# Altium PCB cs301_template.PcbDoc
Units mil, origin at the board's own origin, x right, y up, seen from the top; angles counter-clockwise.
Board outline 3460 x 5000 mil, 2 copper layers (Top Layer, Bottom Layer); 109 components, 56 nets, 306 pads, 93 vias.
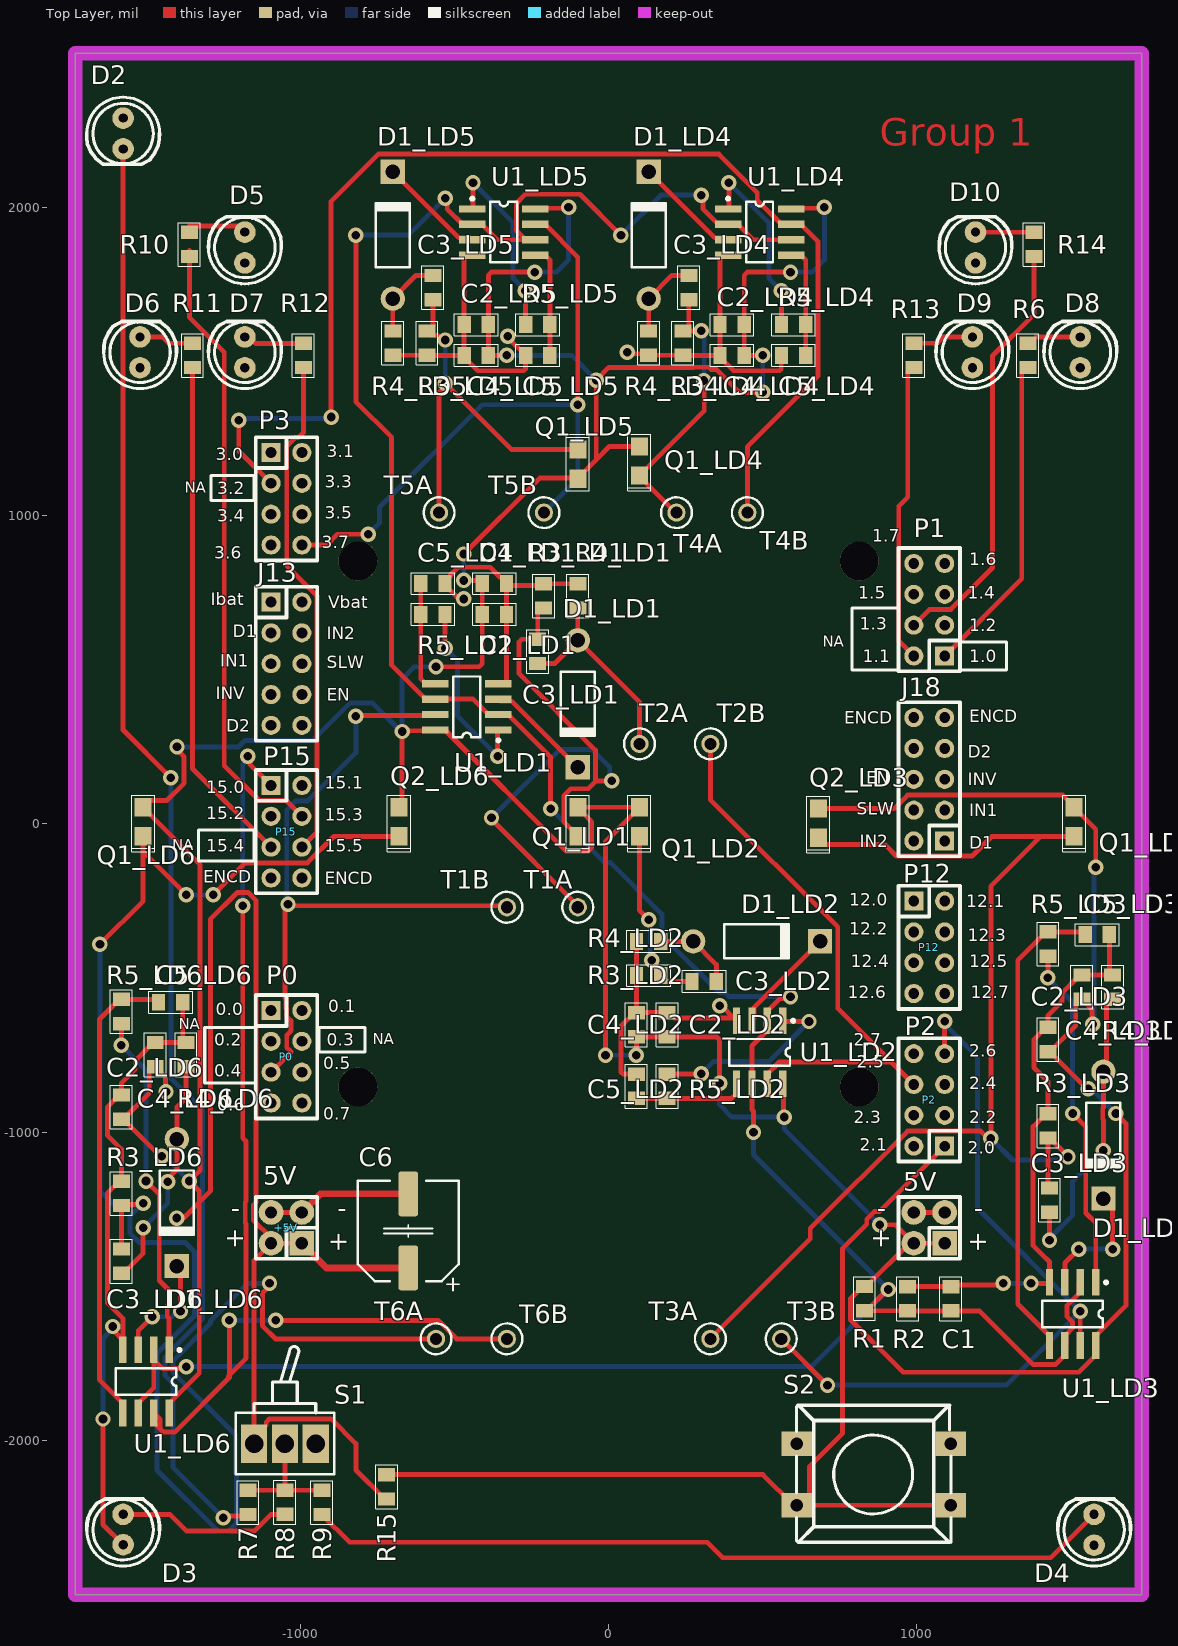
[diagram p0: Top Layer view]
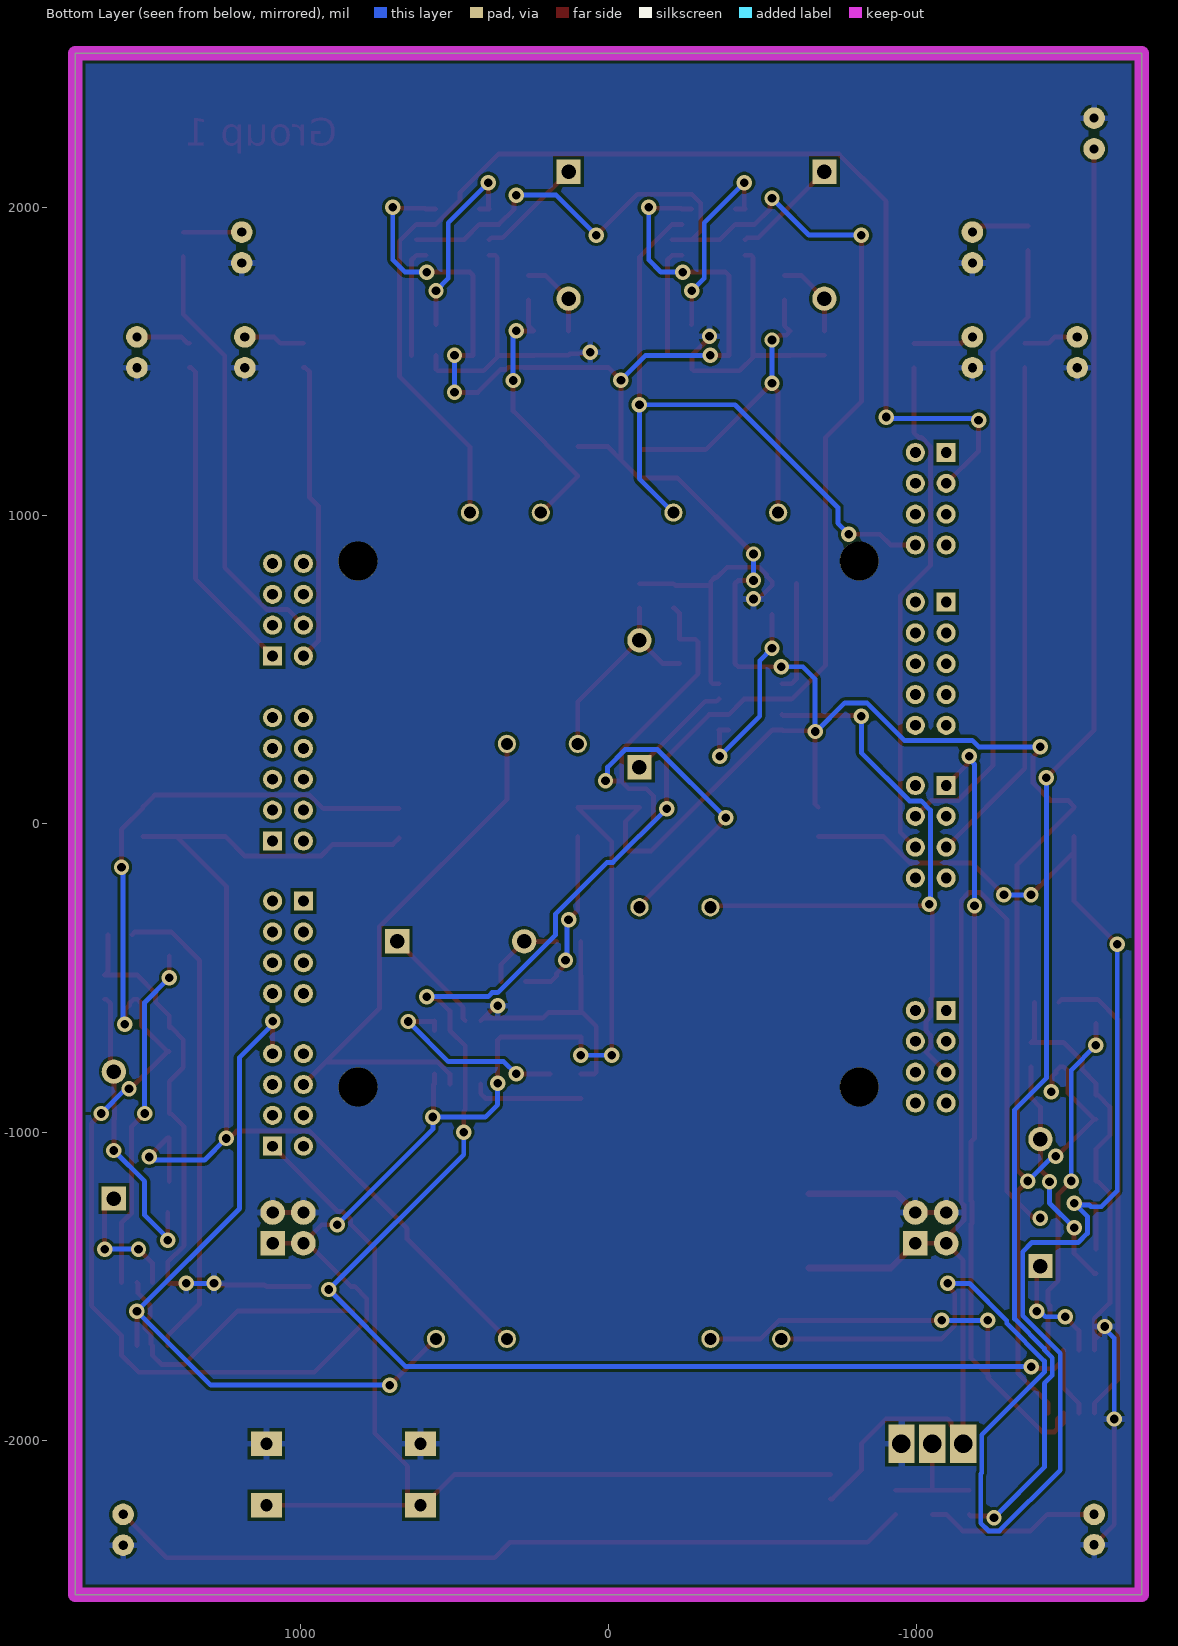
[diagram p1: Bottom Layer view, seen from below]

## Layer stack, top to bottom
Top Solder: solder mask 0.4, Solder Resist, Dk 3.5
Top Layer: signal copper 1.4
Dielectric1: dielectric 12.6, FR-4, Dk 4.8
Bottom Layer: signal copper 1.4
Bottom Solder: solder mask 0.4, Solder Resist, Dk 3.5

## Board outline
-1730,-2500 -1730,2500 1730,2500 1730,-2500

## Design rules (kind name [scope] priority, off if disabled: settings)
Clearance [All] p1: gap=10 ignorepadtopadclearanceinfootprint=FALSE except(0: Arc-Hole Track-Hole SMDPad-Hole THPad-Hole Via-Hole Fill-Hole Poly-Hole Region-Hole Text-Hole)
PolygonConnect [All] p1: connectstyle=Relief reliefconductorwidth=20 reliefentries=4 polygonreliefangle="90 Angle" airgapwidth=10
RoomDefinition LD1 [InComponentClass('LD1')] p1: confinementstyle=ConfineIn formatcopy=TRUE lockcomponents=FALSE outline 40,980 -780,980 -780,40 40,40
RoomDefinition LD3 [InComponentClass('LD3')] p2: confinementstyle=ConfineIn formatcopy=TRUE lockcomponents=FALSE outline 1685.63,-189.13 1345.63,-189.13 1345.63,-1840.94 1685.63,-1840.94
RoomDefinition LD2 [InComponentClass('LD2')] p3: confinementstyle=ConfineIn formatcopy=TRUE lockcomponents=FALSE outline -110,-240.63 -110,-1060.63 840,-1060.63 840,-240.63
RoomDefinition LD5 [InComponentClass('LD5')] p4: confinementstyle=ConfineIn formatcopy=TRUE lockcomponents=FALSE outline -840,1320 -20,1320 -20,2230 -840,2230
RoomDefinition LD4 [InComponentClass('LD4')] p5: confinementstyle=ConfineIn formatcopy=TRUE lockcomponents=FALSE outline -10,1320 810,1320 810,2250 -10,2250
RoutingVias [All] p1: holewidth=28 width=50 viastyle="Through Hole" minholewidth=28 minwidth=50 maxholewidth=28 maxwidth=50
SilkToSolderMaskClearance SilkscreenOverComponentPads [IsPad] p1: minsilkscreentomaskgap=10 clearancetoexposedcopper=TRUE
SolderMaskExpansion TentingVias [IsVia] p1: expansion=9.84 istentingtop=TRUE useseparateexpansions=TRUE expansionbottom=9.84 istentingbottom=TRUE
SolderMaskExpansion [All] p2: expansion=4 istentingtop=FALSE
SupplyNets "Schematic Supply Nets_2" [InNet('VREF1')] p1: voltage=0.000
SupplyNets "Schematic Supply Nets_1" [InNet('+5V')] p2: voltage=0.000
SupplyNets "Schematic Supply Nets" [InNet('GND')] p3: voltage=0.000
Width [All] p1: maxlimit=30 minlimit=15.75 preferedwidth=15.75 minimp=50.000000 maximp=50.000000 favimp=50.000000
29 further rules are at their usual default settings.

## Classes and differential pairs
channel class LD: LD1 LD2 LD3 LD4 LD5 LD6
component class LD6: C2_LD6 C3_LD6 C4_LD6 C5_LD6 D1_LD6 Q1_LD6 Q2_LD6 R3_LD6 R4_LD6 R5_LD6 U1_LD6
component class LD5: C2_LD5 C3_LD5 C4_LD5 C5_LD5 D1_LD5 Q1_LD5 R3_LD5 R4_LD5 R5_LD5 U1_LD5
component class LD4: C2_LD4 C3_LD4 C4_LD4 C5_LD4 D1_LD4 Q1_LD4 R3_LD4 R4_LD4 R5_LD4 U1_LD4
component class LD3: C2_LD3 C3_LD3 C4_LD3 C5_LD3 D1_LD3 Q1_LD3 Q2_LD3 R3_LD3 R4_LD3 R5_LD3 U1_LD3
component class LD2: C2_LD2 C3_LD2 C4_LD2 C5_LD2 D1_LD2 Q1_LD2 R3_LD2 R4_LD2 R5_LD2 U1_LD2
component class LD1: C2_LD1 C3_LD1 C4_LD1 C5_LD1 D1_LD1 Q1_LD1 R3_LD1 R4_LD1 R5_LD1 U1_LD1

## Components (designator, comment, footprint, x,y, rotation, side; value= is the part's Value field where it differs from the comment)
5V "5V" IDC4 1090,-1360 r90 top locked
+5V "5V" IDC4 -995,-1360 r90 top locked
C1 "100nf" "0805 CAP" 1110,-1540 r90 top
C2_LD1 "100nf" "0805 CAP" -370.63,680 r0 top (schematic designator C2)
C2_LD2 "100nf" "0805 CAP" 190,-651.26 r90 top (schematic designator C2)
C2_LD3 "100nf" "0805 CAP" 1425,-699.13 r90 top (schematic designator C2)
C2_LD4 "100nf" "0805 CAP" 400.63,1620 r180 top (schematic designator C2)
C2_LD5 "100nf" "0805 CAP" -429.37,1620 r180 top (schematic designator C2)
C2_LD6 "100nf" "0805 CAP" -1580.63,-918.19 r90 top (schematic designator C2)
C3_LD1 "150nf" "0805 CAP" -230,560 r270 top (schematic designator C3)
C3_LD2 "150nf" "0805 CAP" 310,-510.63 r0 top (schematic designator C3)
C3_LD3 "150nf" "0805 CAP" 1430,-1220 r270 top (schematic designator C3)
C3_LD4 "150nf" "0805 CAP" 260,1740 r90 top (schematic designator C3)
C3_LD5 "150nf" "0805 CAP" -570,1740 r90 top (schematic designator C3)
C3_LD6 "150nf" "0805 CAP" -1580.63,-1418.19 r270 top (schematic designator C3)
C4_LD1 "100nf" "0805 CAP" -370.63,780 r0 top (schematic designator C4)
C4_LD2 "100nf" "0805 CAP" 90,-651.26 r90 top (schematic designator C4)
C4_LD3 "100nf" "0805 CAP" 1535,-529.13 r90 top (schematic designator C4)
C4_LD4 "100nf" "0805 CAP" 400.63,1520 r180 top (schematic designator C4)
C4_LD5 "100nf" "0805 CAP" -429.37,1520 r180 top (schematic designator C4)
C4_LD6 "100nf" "0805 CAP" -1470.63,-748.19 r90 top (schematic designator C4)
C5_LD1 "150nf" "0805 CAP" -570,780 r0 top (schematic designator C5)
C5_LD2 "150nf" "0805 CAP" 90,-850.63 r90 top (schematic designator C5)
C5_LD3 "150nf" "0805 CAP" 1585,-359.13 r0 top (schematic designator C5)
C5_LD4 "150nf" "0805 CAP" 600,1520 r180 top (schematic designator C5)
C5_LD5 "150nf" "0805 CAP" -230,1520 r180 top (schematic designator C5)
C5_LD6 "150nf" "0805 CAP" -1420.63,-578.19 r0 top (schematic designator C5)
C6 "*" "CAP POL 8x5.4mm SMT" -650,-1319.92 r90 top
D1_LD1 "" ECE-DIO10.46-5.3x2.8TH -100,390 r270 top value=BAT85 (schematic designator D1)
D1_LD2 "" ECE-DIO10.46-5.3x2.8TH 480,-380.63 r0 top value=BAT85 (schematic designator D1)
D1_LD3 "" ECE-DIO10.46-5.3x2.8TH 1605,-1009.13 r270 top value=BAT85 (schematic designator D1)
D1_LD4 "" ECE-DIO10.46-5.3x2.8TH 130,1910 r90 top value=BAT85 (schematic designator D1)
D1_LD5 "" ECE-DIO10.46-5.3x2.8TH -700,1910 r90 top value=BAT85 (schematic designator D1)
D1_LD6 "" ECE-DIO10.46-5.3x2.8TH -1400.63,-1228.19 r270 top value=BAT85 (schematic designator D1)
D2 "LED" LED0.1/5MM#1 -1574.8,2189.76 r180 top locked
D3 "LED" LED0.1/5MM#2 -1574.8,-2239.37 r0 top locked
D4 "LED" LED0.1/5MM#1 1574.8,-2239.37 r0 top locked
D5 "LED" LED0.1/5MM#1 -1180,1920 r0 top
D6 "LED" LED0.1/5MM#1 -1520,1580 r0 top
D7 "LED" LED0.1/5MM#1 -1180,1580 r0 top
D8 "LED" LED0.1/5MM#1 1530,1580 r0 top
D9 "LED" LED0.1/5MM#1 1180,1580 r0 top
D10 "LED" LED0.1/5MM#1 1190,1920 r0 top
J13 "CON10" IDC10 -1095,720 r270 top locked
J18 "CON10" IDC10 1090,-55 r90 top locked
P0 "P0" idc8 -1095,-605 r270 top locked
P1 "P1" idc8 1090,545 r90 top locked
P2 "P2" idc8 1090,-1045 r90 top locked
P3 "P3" idc8 -1095,1205 r270 top locked
P12 "P12" idc8 990,-250 r270 top locked
P15 "P15" IDC8 -1095,125 r270 top locked
Q1_LD1 "VEMT3700" "0805 LED" -100,7.24 r270 top locked (schematic designator Q1)
Q1_LD2 "VEMT3700" "0805 LED" 100,7.24 r270 top (schematic designator Q1)
Q1_LD3 "VEMT3700" "0805 LED" 1510,7.24 r270 top locked (schematic designator Q1)
Q1_LD4 "VEMT3700" "0805 LED" 100,1177.24 r270 top locked (schematic designator Q1)
Q1_LD5 "VEMT3700" "0805 LED" -100,1167.4 r90 top locked (schematic designator Q1)
Q1_LD6 "VEMT3700" "0805 LED" -1510,7.24 r270 top locked (schematic designator Q1)
Q2_LD3 "VEMT3700" "0805 LED" 680,2.76 r270 top (schematic designator Q2)
Q2_LD6 "VEMT3700" "0805 LED" -680,7.24 r270 top (schematic designator Q2)
R1 "270k" "0805 RES" 830,-1539.37 r90 top
R2 "30k" "0805 RES" 970,-1540 r270 top
R3_LD1 "47k" "0805 RES" -210.63,740 r270 top (schematic designator R3)
R3_LD2 "47k" "0805 RES" 130,-491.26 r0 top (schematic designator R3)
R3_LD3 "47k" "0805 RES" 1425,-979.13 r270 top (schematic designator R3)
R3_LD4 "47k" "0805 RES" 240.63,1560 r90 top (schematic designator R3)
R3_LD5 "47k" "0805 RES" -589.37,1560 r90 top (schematic designator R3)
R3_LD6 "47k" "0805 RES" -1580.63,-1198.19 r270 top (schematic designator R3)
R4_LD1 "100k" "0805 RES" -100,740 r270 top (schematic designator R4)
R4_LD2 "100k" "0805 RES" 130,-380.63 r0 top (schematic designator R4)
R4_LD3 "100k" "0805 RES" 1635,-529.13 r270 top (schematic designator R4)
R4_LD4 "100k" "0805 RES" 130,1560 r90 top (schematic designator R4)
R4_LD5 "100k" "0805 RES" -700,1560 r90 top (schematic designator R4)
R4_LD6 "100k" "0805 RES" -1370.63,-748.19 r270 top (schematic designator R4)
R5_LD1 "100k" "0805 RES" -570,680 r180 top (schematic designator R5)
R5_LD2 "100k" "0805 RES" 190,-850.63 r270 top (schematic designator R5)
R5_LD3 "100k" "0805 RES" 1425,-389.13 r90 top (schematic designator R5)
R5_LD4 "100k" "0805 RES" 600,1620 r0 top (schematic designator R5)
R5_LD5 "100k" "0805 RES" -230,1620 r0 top (schematic designator R5)
R5_LD6 "100k" "0805 RES" -1580.63,-608.19 r90 top (schematic designator R5)
R6 "RES4" "0805 RES" 1360,1520 r270 top
R7 "RES1" "0805 RES" -1170,-2200.63 r90 top
R8 "RES2" "0805 RES" -1050,-2200 r90 top
R9 "RES3" "0805 RES" -930,-2200.63 r90 top
R10 "RES4" "0805 RES" -1360,1880 r270 top
R11 "RES5" "0805 RES" -1350,1520 r270 top
R12 "RES6" "0805 RES" -990,1520 r270 top
R13 "RES5" "0805 RES" 990,1520 r270 top
R14 "RES6" "0805 RES" 1380,1880 r270 top
R15 "*" "0805 RES" -720,-2150 r90 top
S1 "SW-SPDT" SW-SPDT -1150,-2010 r0 top
S2 "SW-PB" SW-PB 1010,-2230 r180 top
T1A "Comment" TP_TH -100,-270 r0 top
T1B "Comment" TP_TH -330,-270 r0 top
T2A "Comment" TP_TH 100,260 r0 top
T2B "Comment" TP_TH 330,260 r0 top
T3A "Comment" TP_TH 330,-1670 r0 top
T3B "Comment" TP_TH 560,-1670 r0 top
T4A "Comment" TP_TH 220,1010 r0 top
T4B "Comment" TP_TH 450,1010 r0 top
T5A "Comment" TP_TH -550,1010 r0 top
T5B "Comment" TP_TH -210,1010 r0 top
T6A "Comment" TP_TH -560,-1670 r0 top
T6B "Comment" TP_TH -330,-1670 r0 top
U1_LD1 "TLC082" ECE-SOIC8 -460,380 r180 top (schematic designator U1)
U1_LD2 "TLC082" ECE-SOIC8 490,-740.63 r270 top (schematic designator U1)
U1_LD3 "TLC082" ECE-SOIC8 1505,-1589.13 r270 top (schematic designator U1)
U1_LD4 "TLC082" ECE-SOIC8 490,1920 r0 top (schematic designator U1)
U1_LD5 "TLC082" ECE-SOIC8 -340,1920 r0 top (schematic designator U1)
U1_LD6 "TLC082" ECE-SOIC8 -1500.63,-1808.19 r270 top (schematic designator U1)

## Footprints (in the part's own frame and the unit in brackets; to place one, negate y for a bottom-side part, rotate by r counter-clockwise, add the part's x,y. Pads: shape width x height; smd on the part's side, far side on the other; paste and mask are expansions set on the pad)
"0805 CAP" [mm] "http://www.digikey.co.nz/Web%20Export/Supplier%20Content/Vishay_8026/PDF/VishayBeyschlag_SolderPad.pdf?redirected=1 with dimension G modified by +0.25mm"
  rect 1.1x1.4 smd: 1(-1,0) 2(1,0)
  silkscreen extent -1.8,-0.9 1.8,0.9, body extent -1.04,-0.66 1.04,0.66, height 0.61
"0805 LED" [mm] "RED AS AlGaAs SMD LED, Body; 2mm x 1.25 mm (LxW)"
  rect 1.5x1.4 smd: 1(-1.2,0) 2(1.2,0)
  silkscreen extent -2.2,-0.95 2.45,0.95, body extent -1,-0.63 1,0.63, height 1.1
"0805 RES" [mm] "http://www.digikey.co.nz/Web%20Export/Supplier%20Content/Vishay_8026/PDF/VishayBeyschlag_SolderPad.pdf?redirected=1 with dimension G modified by +0.25mm"
  rect 1.1x1.4 smd: 1(-1,0) 2(1,0)
  silkscreen extent -1.8,-0.9 1.8,0.9, body extent -1.04,-0.66 1.04,0.66, height 0.61
"CAP POL 8x5.4mm SMT" [mm]
  round 0.508 on Mech15: 0(0,0)
  rrect25% 3.7x1.6 smd: 1(-3.05,0) 2(3.05,0)
  silkscreen extent -4.9,-4.2 4.15,4.15, body extent -4.5,-4.15 4.5,4.15, height 5.4
ECE-DIO10.46-5.3x2.8TH [mm] "Diode, Axial; Body 5.2 x 2.7 mm (LxDia. max), Lead Dia. 0.86 mm (max)"
  round 2 hole 1.2: 1(-5.23,0)
  rect 2x2 hole 1.2: 2(5.23,0)
  silkscreen extent -2.65,-1.4 2.74,1.4
ECE-SOIC8 [mm] "Small Outline; 8 Leads; Body Width 3.9 mm; Pitch 1.27 mm"
  rect 2.2x0.6 smd: 1(-2.6,1.905) 2(-2.6,0.635) 3(-2.6,-0.635) 4(-2.6,-1.905) 5(2.6,-1.905) 6(2.6,-0.635) 7(2.6,0.635) 8(2.6,1.905)
  silkscreen extent -2.72,-2.5 1.1,2.88, body extent -3,-2.45 3,2.45, height 1.7
IDC4 [mil]
  rect 80x80 hole 40: 1(0,0)
  round 80 hole 40: 2(0,100) 3(100,0) 4(100,100)
  silkscreen extent -50,-50 150,150
idc8 [mil]
  rect 62x62 hole 35: 1(0,0)
  round 62 hole 35: 2(0,100) 3(100,0) 4(100,100) 5(200,0) 6(200,100) 7(300,0) 8(300,100)
  silkscreen extent -50,-50 350,150
IDC8 [mil]
  rect 62x62 hole 35: 1(0,0)
  round 62 hole 35: 2(0,100) 3(100,0) 4(100,100) 5(200,0) 6(200,100) 7(300,0) 8(300,100)
  silkscreen extent -50,-50 350,150
IDC10 [mil]
  rect 62x62 hole 35: 1(0,0)
  round 62 hole 35: 2(0,100) 3(100,0) 4(100,100) 5(200,0) 6(200,100) 7(300,0) 8(300,100) 9(400,0) 10(400,100)
  silkscreen extent -50,-50 450,150
LED0.1/5MM#1 [mil]
  round 70 hole 30: A(0,0) K(0,-100)
  silkscreen extent -118,-168 118,50
LED0.1/5MM#2 [mil]
  round 70 hole 30: A(0,0) K(0,-98.42)
  silkscreen extent -118,-168 118,50
SW-PB [mil]
  rect 100x80 hole 40: 1(-100,-20) 1(400,-20) 2(-100,-220) 2(400,-220)
  silkscreen extent -100,-345 400,100
SW-SPDT [mil]
  rect 85x125 hole 60: 1(0,0) 2(100,0) 3(200,0)
  silkscreen extent -60,-100 260,315
TP_TH [mm] "Test Point, Through Hole, Dia 2.54mm"
  round 1.5 hole 1: 1(0,0)
  silkscreen extent -1.27,-1.27 1.27,1.27, body extent -1.27,-1.27 1.27,1.27, height 4.57

## Part data
5V +5V: library part CON4, "Connector"
C1 C2_LD1 C2_LD2 C2_LD3 C2_LD4 C2_LD5 C2_LD6 C3_LD1 C3_LD2 C3_LD3 C3_LD4 C3_LD5 C3_LD6 C4_LD1 C4_LD2 C4_LD3 C4_LD4 C4_LD5 C4_LD6 C5_LD1 C5_LD2 C5_LD3 C5_LD4 C5_LD5 C5_LD6: library part CerCap_SMT_0805, "SMT ceramic capacitor 0805 size"
C6: library part ElecCap_SMT_8D0, "CAP ALUM 22UF 20% 50V SMD (Model: UWX1H220MCL1GB)", Capacitance 1="22 µF", ESR (Equivalent Series Resistance)=-, Lifetime @ Temp.="2000 Hrs @ 85°C", Manufacturer=Nichicon, Manufacturer Part Number=UWX1V220MCL1GB, Operating Temperature="-40°C ~ 85°C", Package / Case="Radial, Can - SMD", Supplier Part Number 1=493-2136-1-ND, Tolerance=±20%, Applications="General Purpose", Category=Capacitors, ComponentLink1Description=http://nichicon-us.com/english/products/pdfs/e-uwx.pdf, ComponentLink1URL=http://nichicon-us.com/english/products/pdfs/e-uwx.pdf, Height - Seated (Max)="0.213\" (5.40mm)", Lead Spacing=-, Mounting Type="Surface Mount", Packaging="Cut Tape (CT)", Part Status=Active, Polarization=Polar, Pricing 1="1=0.59, 10=0.406, 100=0.2304, 500=0.16268 (NZD)", Ratings=-, Revision="July-2002: Re-released for DXP Platform.", RoHS="RoHS Compliant", Size / Dimension="0.248\" Dia (6.30mm)", Stock 1=680, Supplier 1=Digi-Key, Surface Mount Land Size="0.260\" L x 0.260\" W (6.60mm x 6.60mm)"
D1_LD1 D1_LD2 D1_LD3 D1_LD4 D1_LD5 D1_LD6: library part DIO000006, "Schottky Small Signal Diode 200mA 30V TH", Manufactuer=NXP, Manufacturer-PN=BAT85, Size/Package=Axial, Voltage/Current=200mA-30V, Assembly Method="Through hole", Category=Diode, Datasheet Link=http://share.engineering.auckland.ac.nz/ece/ts/Student%20Documents/BAT85_diode.pdf, Item Type=Item, Path="ece/ts/Lists/Stock Inventory", Status=Active, Supplier1=Element14, Supplier1-PN=1097299, UoA Stock#=DIO000006
J13 J18: "Connector"
P0 P1 P2 P3: library part CON8, "Connector"
P12 P15: library part CON8_1, "Connector"
Q1_LD1 Q1_LD2 Q1_LD3 Q1_LD4 Q1_LD5 Q1_LD6 Q2_LD3 Q2_LD6: "Silicon NPN Phototransistor"
R1 R2 R3_LD1 R3_LD2 R3_LD3 R3_LD4 R3_LD5 R3_LD6 R4_LD1 R4_LD2 R4_LD3 R4_LD4 R4_LD5 R4_LD6 R5_LD1 R5_LD2 R5_LD3 R5_LD4 R5_LD5 R5_LD6 R6 R7 R8 R9 R10 R11 R12 R13 R14 R15: library part Res_SMT_0805, "0805 resistor", ComponentLink1Description=https://nz.mouser.com/datasheet/2/315/AOA0000C304-1149620.pdf, LatestRevisionDate=17-Jul-2002, LatestRevisionNote="Re-released for DXP Platform.", PackageReference=AXIAL-0.4, Published=8-Jun-2000, Publisher="Altium Limited"
S1: "Toggle Switch"
S2: "Push Button Switch"
U1_LD1 U1_LD2 U1_LD3 U1_LD4 U1_LD5 U1_LD6: library part OPA000103, "IC OPAMP TLC082 GP 10MHZ 8SOIC", Manufactuer="Texas Instruments", Manufacturer-PN=TLC082IDR, Size/Package="SOIC 8", Assembly Method="Surface Mount", Category=OpAmp, Component Type=SOIC18-TLC082, Datasheet Link=http://share.engineering.auckland.ac.nz/ece/ts/Student%20Documents/TLC082.pdf, Item Type=Item, Path="ece/ts/Lists/Stock Inventory", Status=Active, Supplier1=Digikey, Supplier1-PN=296-7271-6-ND, UoA Stock#=OPA000103

## Free pads (board coordinates)
  round 125.98 hole 125.98 unplated: 1(-813,-853) 1(-813,853) 1(813,-853) 1(813,853)

## Via types
v1: diameter 50, hole 28, Top Layer to Bottom Layer, tented both sides, 93 vias

## Nets (pads, with @x,y where several pads share a name; then routed paths per layer and width w, separated by ;. In a path a pad name is that pad's centre, name@x,y a point inside that pad or via, vN(x,y) a via of type N, cw(c..) or ccw(c..) an arc to the next point about the centre after c; other vN are vias at no path point)
+5V: 5V.1 5V.2 +5V.1 +5V.2 C2_LD1.1 C2_LD2.1 C2_LD3.1 C2_LD4.1 C2_LD5.1 C2_LD6.1 C4_LD1.1 C4_LD2.1 C4_LD3.1 C4_LD4.1 C4_LD5.1 C4_LD6.1 C6.1 Q1_LD1.1 Q1_LD2.1 Q1_LD3.1 Q1_LD4.1 Q1_LD5.1 Q1_LD6.1 Q2_LD3.1 Q2_LD6.1 R1.2 R15.1 S1.1 U1_LD1.8 U1_LD2.8 U1_LD3.8 U1_LD4.8 U1_LD5.8 U1_LD6.8 | length 20929.7
  Top Layer w15.75: C2_LD6.1 -1574.72,-957.56 -1454.09,-1078.19 v1(-1450,-1078.19) ; C2_LD6.1@-1575.35,-958.19 -1490.32,-873.15 -1490.32,-801.34 -1476.54,-787.56 C4_LD6.1 -1464.72,-787.56 -1450.94,-801.34 -1450.94,-807.24 -1437.76,-820.43 -1437.76,-866.93 v1(-1435.63,-869.05) ; Q1_LD6.1@-1510,52.52 -1325.2,-132.28 -1325.2,-1123.39 v1(-1360,-1158.19) -1327.76,-1190.43 -1327.76,-1226.85 ; Q1_LD6.1 -1510,56.46 -1490.31,76.14 -1433.22,76.14 -1377.13,132.24 -1377.13,217.86 -1400,240.73 v1(-1400,250) ; U1_LD6.8 -1425.63,-1879.06 -1327.76,-1781.18 -1327.76,-1226.85 ; v1(-1400.63,-1278.19) -1379.1,-1278.19 -1327.76,-1226.85 ; S1.1 S1.1@-1150,-1990 ; +5V.1 +5V.2 ; R15.1 -725.91,-2189.37 -819.89,-2095.38 -819.89,-2009.83 -900.1,-1929.63 -1099.9,-1929.63 -1110.37,-1940.1 -1110.37,-1950.37 S1.1@-1150,-1990 ; Q2_LD6.1 -670,64.49 v1(-670,300) -667.5,302.5 -564.86,302.5 U1_LD1.8 -530.87,305 -138.46,-87.4 -65.04,-87.4 -54.57,-76.93 -54.57,7.09 -100,52.52 Q1_LD1.1 Q1_LD2.1 100,52.52 -10,-57.48 v1(-10,-750) ; v1(-560,510) -420,510 -410,520 C2_LD1.1 C4_LD1.1 -420,790 v1(-470,790) ; v1(-470,875.75) -223.62,1122.13 -100,1122.13 -40,1182.13 ; v1(-330,1520) C4_LD5.1 C2_LD5.1 -390,1780 -380,1790 v1(-240,1790) ; U1_LD5.8@-269.13,1995 U1_LD5.8 -235.14,1997.5 -132.5,1997.5 v1(-130,2000) ; v1(90,-750) C4_LD2.1 C2_LD2.1 350,-690.63 360,-700.63 v1(360,-840.63) ; Q1_LD4.1 2.36,1224.49 -40,1182.13 ; v1(500,1400) 423.98,1400 349.41,1474.57 332.2,1474.57 325.4,1481.37 275.86,1481.37 275.59,1481.1 1.1,1481.1 v1(-40,1440) -40,1182.13 ; v1(500,1520) C4_LD4.1 C2_LD4.1 440,1780 450,1790 v1(590,1790) ; U1_LD4.8@560.87,1995 U1_LD4.8 594.86,1997.5 697.5,1997.5 v1(700,2000) ; U1_LD2.8@565,-811.5 U1_LD2.8 567.5,-845.49 567.5,-948.13 v1(570,-950.63) ; Q2_LD3.1 925.88,50 969.76,93.87 1472.58,93.87 1510,56.46 1510,52.52 1580,-17.48 v1(1580,-140) ; R1.2 824.09,-1500 784.57,-1539.53 784.57,-1607.8 955.19,-1778.42 1524.57,-1778.42 1580,-1722.99 U1_LD3.8 1580,-1660 1677.87,-1562.13 1677.87,-971.38 v1(1645.63,-939.13) ; R1.2@835.91,-1500 975.9,-1360 5V.2 ; v1(880,-1300) 930,-1300 5V.2 ; 5V.1 5V.2 ; C2_LD3.1 1430.91,-738.5 1551.54,-859.13 v1(1555.63,-859.13) ; C2_LD3.1@1430.28,-739.13 1515.31,-654.09 1515.31,-582.28 1529.09,-568.5 C4_LD3.1 1540.91,-568.5 1554.69,-582.28 1554.69,-588.19 1567.87,-601.38 1567.87,-647.87 v1(1570,-650) ; -1327.76,-1226.85 -1291.85,-1190.94 -1291.85,-309.34 -1204.6,-222.09 -1169.09,-222.09 -1143.97,-247.21 -1143.97,-1227.13 -1152.87,-1236.03 -1152.87,-1284.74 -1095,-1342.61 +5V.2 ; S1.1@-1150,-1990 -1150,-1415 +5V.2
  Top Layer w21.65: +5V.1 -915,-1440 C6.1
  Bottom Layer w15.75: v1(-1450,-1078.19) -1440,-1078.19 v1(-1360,-1158.19) ; v1(-1435.63,-869.05) v1@-1430.63,-864.05 ; v1(-1400,250) -1200.63,250 -1179.51,271.13 -959.51,271.13 -837.76,392.87 -766.41,392.87 -673.54,300 v1(-670,300) -670,470 -630,510 v1(-560,510) ; v1(-470,790) v1(-470,875.75) ; v1(-330,1520) -120,1520 v1(-40,1440) ; v1(-240,1790) -170,1790 -130,1830 v1(-130,2000) ; v1(-10,-750) v1(90,-750) ; v1(360,-840.63) 360,-910.63 400,-950.63 v1(570,-950.63) 570,-990 v1(880,-1300) ; v1(500,1400) v1(500,1520) ; v1(590,1790) 660,1790 700,1830 v1(700,2000) ; v1(1555.63,-859.13) 1565.63,-859.13 v1(1645.63,-939.13) ; v1(1570,-650) 1575,-645 1575,-145 v1(1580,-140)
GND: 5V.3 5V.4 +5V.3 +5V.4 C1.2 C2_LD1.2 C2_LD2.2 C2_LD3.2 C2_LD4.2 C2_LD5.2 C2_LD6.2 C4_LD1.2 C4_LD2.2 C4_LD3.2 C4_LD4.2 C4_LD5.2 C4_LD6.2 C5_LD1.2 C5_LD2.2 C5_LD3.2 C5_LD4.2 C5_LD5.2 C5_LD6.2 C6.2 D2.K D3.K D4.K D5.K D6.K D7.K D8.K D9.K D10.K R2.1 R3_LD1.1 R3_LD2.1 R3_LD3.1 R3_LD4.1 R3_LD5.1 R3_LD6.1 R4_LD1.1 R4_LD2.1 R4_LD3.1 R4_LD4.1 R4_LD5.1 R4_LD6.1 S1.3 S2.2 U1_LD1.4 U1_LD2.4 U1_LD3.4 U1_LD4.4 U1_LD5.4 U1_LD6.4 | length 8252.6
  Top Layer w15.75: v1(-1640,-1930) -1640,-2272.6 D3.K ; v1(-1608.94,-1630) -1602.38,-1636.55 -1602.38,-1647.58 U1_LD6.4@-1575.63,-1674.33 ; U1_LD6.4 U1_LD6.4@-1575.63,-1674.33 ; C5_LD6.2 -1381.26,-698.19 R4_LD6.1 C4_LD6.2 -1476.54,-708.82 -1535.47,-767.76 -1535.47,-795.58 -1580.63,-840.74 C2_LD6.2 -1586.54,-878.82 -1626.06,-918.35 -1626.06,-1008.98 -1580.63,-1054.41 R3_LD6.1 -1586.54,-1158.82 -1626.06,-1198.35 -1626.06,-1553.39 -1575.63,-1603.82 U1_LD6.4@-1575.63,-1674.33 ; +5V.4 +5V.3 ; R4_LD5.1 R3_LD5.1 -588.74,1520 C4_LD5.2 ; v1(-470,730) -476.55,736.55 -493.09,736.55 -530.63,774.09 -530.63,785.91 -512.87,803.66 -512.87,807.76 -487.76,832.87 -384.13,832.87 -350.94,799.69 -345.04,799.69 -331.26,785.91 C4_LD1.2 ; U1_LD5.4 -461.93,1845 -468.74,1838.19 C2_LD5.2 C4_LD5.2 ; U1_LD1.4 -338.07,455 -331.26,461.81 C2_LD1.2 -331.26,774.09 C4_LD1.2 ; v1(-327.27,1582.02) -327.27,1577.9 C5_LD5.2 -270,1519.37 -270,1475.86 -275.86,1470 -424.65,1470 -468.74,1514.09 C4_LD5.2 ; R4_LD1.1 R3_LD1.1 -215.91,774.09 -325.35,774.09 C4_LD1.2 ; v1(60,1530) 64.69,1525.31 125.31,1525.31 R4_LD4.1 R3_LD4.1 241.26,1520 C4_LD4.2 ; C5_LD2.2 89.37,-810.63 45.86,-810.63 40,-804.77 40,-655.98 84.09,-611.89 C4_LD2.2 ; R4_LD2.1 R3_LD2.1 90,-491.89 C4_LD2.2 ; v1(360,-590) 366.73,-590 U1_LD2.4@406.54,-629.81 ; U1_LD4.4 368.07,1845 361.26,1838.19 C2_LD4.2 C4_LD4.2 ; U1_LD2.4 U1_LD2.4@406.54,-629.81 ; C5_LD4.2 560,1519.37 560,1475.86 554.14,1470 405.35,1470 361.26,1514.09 C4_LD4.2 ; R2.1 C1.2 1115.31,-1495.31 1274.69,-1495.31 v1(1280,-1490) ; 5V.4 5V.3 ; v1(1370,-1490) 1426.77,-1490 U1_LD3.4 1430,-1419.84 1403.96,-1393.8 1403.17,-1393.8 1377.13,-1367.76 1377.13,-981.73 1419.09,-939.76 R3_LD3.1 1425,-835.35 1379.57,-789.92 1379.57,-699.29 1419.09,-659.76 C2_LD3.2 1425,-621.69 1470.16,-576.53 1470.16,-548.7 1529.09,-489.76 C4_LD3.2 R4_LD3.1 1624.37,-479.13 C5_LD3.2 ; C4_LD2.2 195.91,-611.89 213.82,-629.81 U1_LD2.4@406.54,-629.81
  Top Layer w21.65: +5V.3 -934.84,-1199.84 C6.2
  Bottom Layer w15.75: v1(-1640,-1930) -1640,-1667.7 -1608.94,-1636.64 v1(-1608.94,-1630) ; v1(1280,-1490) v1(1370,-1490)
LED1: P15.4 R10.2 | length 2037.9
  Top Layer w15.75: R10.2@-1360,1860.63 -1360,1643.86 -1246.7,1530.56 -1246.7,189.42 -1133.4,76.13 -1046.13,76.13 P15.4
LED2: P15.5 R11.2 | length 1661.3
  Top Layer w15.75: R11.2 -1350,180 P15.5
LED3: P15.6 R12.2 | length 1643.9
  Top Layer w15.75: P15.6 -946.13,-26.13 -946.13,740.24 -1043.87,837.99 -1043.87,1225.24 -1015.24,1253.87 -1005.24,1253.87 -990,1269.12 R12.2@-990,1480
LED4: P1.1 R6.2 | length 1050.9
  Top Layer w15.75: P1.1 1340.31,795.31 1340.31,1466.85 1354.09,1480.63 R6.2
LED5: P1.2 R13.2 | length 979.6
  Top Layer w15.75: P1.2 941.13,593.87 941.13,1031.21 970.31,1060.4 970.31,1466.85 984.09,1480.63 R13.2
LED6: P1.4 R14.2 | length 1397.7
  Top Layer w15.75: P1.4 1041.13,696.13 1110.24,696.13 1245.12,831 1245.12,1518.98 1380,1653.86 R14.2
NetC3_LD1_1: C3_LD1.1 Q1_LD1.2 R3_LD1.2 T1A.1 | length 2008.3
  Top Layer w15.75: v1(-380,20) -380,15 -100,-265 T1A.1 ; R3_LD1.2 -213.35,700.63 -230,683.98 C3_LD1.1 -281.18,599.37 -290.41,590.15 -290.41,487.56 -42.76,239.91 -42.76,137.32 ; Q1_LD1.2 -100,-38.03 -145.43,7.4 -145.43,91.42 -122.48,114.37 -65.71,114.37 -40.08,140 v1(10,140)
  Bottom Layer w15.75: v1(-380,20) -158.66,241.34 -53.23,241.34 3.45,184.67 3.45,146.55 v1(10,140)
NetC3_LD1_2: C3_LD1.2 D1_LD1.1 R4_LD1.2 T2A.1 | length 684.7
  Top Layer w15.75: C3_LD1.2 -175.28,520.63 D1_LD1.1 ; R4_LD1.2 D1_LD1.1 ; T2A.1 100,395.91 D1_LD1.1
NetC3_LD2_1: C3_LD2.1 Q1_LD2.2 R3_LD2.2 | length 588.2
  Top Layer w15.75: Q1_LD2.2 100,-280 v1(130,-310) ; v1(140,-442.33) 146.55,-448.88 146.55,-462.54 169.37,-485.35 R3_LD2.2 ; R3_LD2.2@169.37,-493.98 186.02,-510.63 C3_LD2.1
  Bottom Layer w15.75: v1(130,-310) 135,-315 135,-437.33 v1(140,-442.33)
NetC3_LD2_2: C3_LD2.2 D1_LD2.1 R4_LD2.2 | length 265.9
  Top Layer w15.75: R4_LD2.2 D1_LD2.1 349.37,-455.91 C3_LD2.2
NetC3_LD3_1: C3_LD3.1 Q1_LD3.2 Q2_LD3.2 R3_LD3.2 T3A.1 | length 3664.6
  Top Layer w15.75: T3A.1 654.02,-1345.98 654.02,-1311.86 969.76,-996.13 1206.86,-996.13 1230.73,-1020 v1(1240,-1020) 1240,-201.97 1401.97,-40 ; Q2_LD3.2 680,-46.46 699.69,-66.14 895.18,-66.14 932.91,-103.87 1179.68,-103.87 1243.55,-40 1401.97,-40 ; C3_LD3.1@1425,-1159.76 R3_LD3.2 1430.91,-1018.5 1490,-1077.6 v1(1490,-1080) ; Q1_LD3.2 1401.97,-40
  Bottom Layer w15.75: v1(1240,-1020) 1310,-1090 1480,-1090 v1(1490,-1080)
NetC3_LD3_2: C3_LD3.2 D1_LD3.1 R4_LD3.2 | length 962.4
  Top Layer w15.75: v1(1430,-1350) C3_LD3.2 ; v1(1605,-1059.13) 1605,-959.14 1602.76,-956.89 1602.76,-921.38 1605,-919.13 D1_LD3.1 1615.31,-792.91 1615.31,-582.28 1629.09,-568.5 R4_LD3.2
  Bottom Layer w15.75: v1(1430,-1350) 1430,-1344.13 1505,-1269.13 1505,-1159.13 v1(1605,-1059.13)
NetC3_LD4_1: C3_LD4.1 Q1_LD4.2 R3_LD4.2 T4A.1 | length 897.9
  Top Layer w15.75: T4A.1 218.03,1010 100,1128.03 Q1_LD4.2 310,1340 310,1437.53 v1(309.03,1438.49) ; R3_LD4.2@243.35,1599.37 260,1616.02 C3_LD4.1 ; R3_LD4.2@243.66,1599.69 299.68,1599.69 v1(300,1600)
  Bottom Layer w15.75: v1(300,1600) 300.77,1600 310,1590.77 310,1439.46 v1(309.03,1438.49)
NetC3_LD4_2: C3_LD4.2 D1_LD4.1 R4_LD4.2 | length 265.9
  Top Layer w15.75: R4_LD4.2 D1_LD4.1 205.28,1779.37 C3_LD4.2
NetC3_LD5_1: C3_LD5.1 Q1_LD5.2 R3_LD5.2 T5A.1 | length 1267.2
  Top Layer w15.75: R3_LD5.2 -575.59,1585.59 -554.86,1585.59 -539.27,1570 v1(-530,1570) ; R3_LD5.2@-586.65,1599.37 -570,1616.02 C3_LD5.1 ; T5A.1 -550,1400.73 -530,1420.73 v1(-530,1430) -314.65,1214.65 Q1_LD5.2
  Bottom Layer w15.75: v1(-530,1430) v1(-530,1570)
NetC3_LD5_2: C3_LD5.2 D1_LD5.1 R4_LD5.2 | length 265.9
  Top Layer w15.75: R4_LD5.2 D1_LD5.1 -624.72,1779.37 C3_LD5.2
NetC3_LD6_1: C3_LD6.1 Q1_LD6.2 Q2_LD6.2 R3_LD6.2 T6A.1 | length 5768.3
  Top Layer w15.75: v1(-1650,-390) -1510,-250 -1510,-90 ; C3_LD6.1 R3_LD6.2 -1576.85,-1233.78 -1513.78,-1233.78 v1(-1510,-1230) ; Q1_LD6.2 -1510,-90 ; v1(-1370,-230) -1510,-90 ; v1(-1282.32,-230) -1178.45,-126.13 -977.01,-126.13 -890.88,-40 Q2_LD6.2 ; v1(-1100,-1490) -1100,-1499.27 -1122.87,-1522.14 -1122.87,-1627.76 -1080.63,-1670 T6A.1
  Bottom Layer w15.75: v1(-1650,-390) -1650,-1190 -1598.28,-1241.72 -1564.63,-1241.72 -1558.62,-1235.71 v1@-1515.71,-1235.71 ; v1(-1510,-1230) -1552.87,-1272.87 -1552.87,-1327.76 -1523.09,-1357.54 -1373.17,-1357.54 -1343.39,-1387.32 -1343.39,-1595.16 -1465,-1716.78 -1465,-2095.63 -1267.76,-2292.87 -1232.24,-2292.87 -1207.13,-2267.76 -1207.13,-2108.19 -1210.37,-2104.94 -1210.37,-1980.89 -1413.5,-1777.76 -1413.5,-1742.24 -1291.38,-1620.12 -1291.38,-1610.75 -1170.63,-1490 v1(-1100,-1490) ; v1(-1370,-230) v1(-1282.32,-230)
NetC3_LD6_2: C3_LD6.2 D1_LD6.1 R4_LD6.2 | length 760.4
  Top Layer w15.75: C3_LD6.2 -1574.72,-1457.56 -1510,-1392.83 v1(-1510,-1310) ; v1(-1430,-1160) -1430,-1150.73 -1400.63,-1121.36 D1_LD6.1 -1400.63,-918.29 -1370.63,-888.29 R4_LD6.2
  Bottom Layer w15.75: v1(-1510,-1310) -1430,-1230 v1(-1430,-1160)
NetC5_LD1_1: C5_LD1.1 R5_LD1.2 U1_LD1.5 | length 362.9
  Top Layer w15.75: C5_LD1.1 R5_LD1.2 -609.37,470.51 -593.86,455 U1_LD1.5
NetC5_LD2_1: C5_LD2.1 R5_LD2.2 U1_LD2.5 | length 362.9
  Top Layer w15.75: C5_LD2.1 R5_LD2.2 399.49,-890 415,-874.49 U1_LD2.5
NetC5_LD3_1: C5_LD3.1 R5_LD3.2 U1_LD3.5 | length 1552.9
  Top Layer w15.75: U1_LD3.5 1430,-1660 1327.13,-1557.13 1327.13,-441.73 1419.09,-349.76 R5_LD3.2 1536.26,-349.76 C5_LD3.1
NetC5_LD4_1: C5_LD4.1 R5_LD4.2 U1_LD4.5 | length 362.9
  Top Layer w15.75: U1_LD4.5 623.86,1845 639.37,1829.49 R5_LD4.2 C5_LD4.1
NetC5_LD5_1: C5_LD5.1 R5_LD5.2 U1_LD5.5 | length 362.9
  Top Layer w15.75: U1_LD5.5 -206.14,1845 -190.63,1829.49 R5_LD5.2 C5_LD5.1
NetC5_LD6_1: C5_LD6.1 R5_LD6.2 U1_LD6.5 | length 1530.7
  Top Layer w15.75: U1_LD6.5 -1575.63,-1879.06 -1651.81,-1802.87 -1651.81,-634.09 -1586.54,-568.82 R5_LD6.2 -1469.37,-568.82 C5_LD6.1
NetD1_LD1_2: D1_LD1.2 U1_LD1.3 | length 349.1
  Top Layer w15.75: U1_LD1.3 -350.83,398.19 -314.09,398.19 D1_LD1.2
NetD1_LD2_2: D1_LD2.2 U1_LD2.3 | length 349.1
  Top Layer w15.75: U1_LD2.3 471.81,-631.46 471.81,-594.72 D1_LD2.2
NetD1_LD3_2: D1_LD3.2 U1_LD3.3 | length 412.8
  Top Layer w15.75: U1_LD3.3 1480,-1424.13 v1(1525,-1379.13) ; D1_LD3.2 1635,-1245.04 v1(1635,-1379.13)
  Bottom Layer w15.75: v1(1525,-1379.13) v1(1635,-1379.13)
NetD1_LD4_2: D1_LD4.2 U1_LD4.3 | length 349.1
  Top Layer w15.75: D1_LD4.2 344.09,1901.81 380.83,1901.81 U1_LD4.3
NetD1_LD5_2: D1_LD5.2 U1_LD5.3 | length 349.1
  Top Layer w15.75: D1_LD5.2 -485.91,1901.81 -449.17,1901.81 U1_LD5.3
NetD1_LD6_2: D1_LD6.2 U1_LD6.3 | length 376.4
  Top Layer w15.75: U1_LD6.3 -1525.63,-1643.19 v1(-1480.63,-1598.19) ; D1_LD6.2 -1388.84,-1445.89 v1(-1388.84,-1579.98)
  Bottom Layer w15.75: v1(-1480.63,-1598.19) -1416.31,-1598.19 -1398.11,-1579.98 v1(-1388.84,-1579.98)
NetD2_A: D2.A R7.1 | length 4759.6
  Top Layer w15.75: D2.A -1574.8,304.8 v1(-1420,150) ; v1(-1250,-2250) -1245,-2245 -1175,-2245 R7.1
  Bottom Layer w15.75: v1(-1420,150) -1420,-824.05 -1317.13,-926.93 -1317.13,-1605.32 -1413.5,-1701.7 -1413.5,-1705.83 -1439.25,-1731.58 -1439.25,-1788.42 -1413.5,-1814.17 -1413.5,-2086.5 v1(-1250,-2250)
NetD3_A: D3.A R8.1 | length 569.1
  Top Layer w15.75: D3.A -1422.93,-2239.37 -1369.43,-2292.87 -1148.38,-2292.87 -1094.88,-2239.37 R8.1
NetD4_A: D4.A R9.1 | length 2621
  Top Layer w15.75: R9.1 -840,-2330 319.84,-2330 369.84,-2380 1434.17,-2380 D4.A
NetD5_A: D5.A R10.1 | length 180.3
  Top Layer w15.75: R10.1@-1360,1939.37 -1359.69,1939.69 -1180.32,1939.69 D5.A@-1180,1940
NetD6_A: D6.A R11.1 | length 178.5
  Top Layer w15.75: D6.A -1447.82,1580 -1427.19,1559.37 R11.1
NetD7_A: D7.A R12.1 | length 198.8
  Top Layer w15.75: D7.A -1165.32,1580 -1144.06,1558.74 R12.1@-990,1558.74
NetD8_A: D8.A R6.1 | length 178.5
  Top Layer w15.75: R6.1 1365.91,1559.37 1386.54,1580 D8.A
NetD9_A: D9.A R13.1 | length 198.5
  Top Layer w15.75: R13.1 1065.11,1559.37 1085.74,1580 D9.A
NetD10_A: D10.A R14.1 | length 190.3
  Top Layer w15.75: D10.A 1190.31,1919.69 1379.69,1919.69 R14.1
NetR5_LD1_1: R5_LD1.1 U1_LD1.1 | length 648.2
  Top Layer w15.75: R5_LD1.1 -530.31,679.69 -530.31,570.31 v1(-530,570) ; U1_LD1.1@-389.13,305 U1_LD1.1 -360,302.64 v1(-360,220)
  Bottom Layer w15.75: v1(-530,570) -490,530 -490,350 v1(-360,220)
NetR5_LD2_1: R5_LD2.1 U1_LD2.1 | length 648.2
  Top Layer w15.75: R5_LD2.1 190.31,-810.94 299.69,-810.94 v1(300,-810.63) ; U1_LD2.1@565,-669.76 U1_LD2.1 567.36,-640.63 v1(650,-640.63)
  Bottom Layer w15.75: v1(300,-810.63) 340,-770.63 520,-770.63 v1(650,-640.63)
NetR5_LD3_1: R5_LD3.1 U1_LD3.1 | length 1122.5
  Top Layer w15.75: v1(1425,-499.13) R5_LD3.1 ; v1(1505,-939.13) 1547.76,-981.89 1547.76,-1261.81 1580,-1294.06 U1_LD3.1
  Bottom Layer w15.75: v1(1425,-499.13) 1505,-579.13 v1(1505,-939.13)
NetR5_LD4_1: R5_LD4.1 U1_LD4.1 | length 648.2
  Top Layer w15.75: v1(390,2080) 390,1997.36 U1_LD4.1 U1_LD4.1@419.13,1995 ; v1(560,1730) 560.31,1729.69 560.31,1620.31 R5_LD4.1
  Bottom Layer w15.75: v1(390,2080) 520,1950 520,1770 v1(560,1730)
NetR5_LD5_1: R5_LD5.1 U1_LD5.1 | length 648.2
  Top Layer w15.75: v1(-440,2080) -440,1997.36 U1_LD5.1 U1_LD5.1@-410.87,1995 ; v1(-270,1730) -269.69,1729.69 -269.69,1620.31 R5_LD5.1
  Bottom Layer w15.75: v1(-440,2080) -310,1950 -310,1770 v1(-270,1730)
NetR5_LD6_1: R5_LD6.1 U1_LD6.1 | length 1127.5
  Top Layer w15.75: v1(-1580.63,-718.19) R5_LD6.1 ; v1(-1500.63,-1158.19) -1457.87,-1200.94 -1457.87,-1480.87 -1425.63,-1513.11 -1425.63,-1556.14 -1431.71,-1562.22 -1431.71,-1597.74 -1425.63,-1603.82 U1_LD6.1
  Bottom Layer w15.75: v1(-1580.63,-718.19) -1500.63,-798.19 v1(-1500.63,-1158.19)
NetR7_2: R7.2 R8.2 R9.2 S1.2 | length 391.2
  Top Layer w15.75: R7.2 -1169.68,-2160.94 -1050.31,-2160.94 R8.2 ; S1.2 R8.2 ; R9.2 -930.32,-2160.94 -1049.69,-2160.94 R8.2
OUTPUT1: P0.5 T1B.1 U1_LD1.7 | length 2296.8
  Top Layer w15.75: P0.5 -1030,-740 -1030,-739.12 -1034.56,-734.56 -1043.87,-725.25 -1043.87,-684.76 -1029.56,-670.44 -1030,-670 -1030,-639.12 -1039.56,-629.56 -1043.87,-625.25 -1043.87,-600 -1046.13,-597.75 -1046.13,-566.6 -1050,-562.72 -1050,-270 v1(-1040,-260) -1035,-265 -335,-265 T1B.1 ; v1(-820,350) -817.5,352.5 -564.86,352.5 U1_LD1.7
  Bottom Layer w15.75: v1(-1040,-260) -1043.87,-256.13 -1043.87,45.24 -1014.12,75 -975.88,75 -820,230.88 v1(-820,350)
OUTPUT2: P2.6 T2B.1 U1_LD2.7 | length 1828.3
  Top Layer w15.75: T2B.1 330,79.29 743.15,-333.86 743.15,-598.15 P2.6 ; U1_LD2.7 515,-811.5 554.36,-772.13 917.13,-772.13
OUTPUT3: P2.7 T3B.1 U1_LD3.7 | length 2470.3
  Top Layer w15.75: T3B.1 v1(710,-1820) ; P2.7 v1(1090,-640) ; U1_LD3.7 v1(1530,-1580)
  Bottom Layer w15.75: v1(710,-1820) 1290,-1820 v1(1530,-1580) 1197.13,-1247.13 1197.13,-757.13 1090,-650 v1(1090,-640)
OUTPUT4: P3.3 T4B.1 U1_LD4.7 | length 4001.5
  Top Layer w15.75: v1(-1200,1310) -1200,1210 P3.3 ; v1(-900,1320) -900,2019.92 -746.77,2173.15 357.48,2173.15 482.34,2048.29 482.34,2023.52 560.87,1945 U1_LD4.7 623.86,1945 678.9,1889.96 678.9,1452.79 450,1223.89 T4B.1
  Bottom Layer w15.75: v1(-1200,1310) -1195,1315 -905,1315 v1(-900,1320)
OUTPUT5: P3.8 T5B.1 U1_LD5.7 | length 2169.2
  Top Layer w15.75: P3.8 -915,905 -880,940 v1(-779.37,940) ; U1_LD5.7 -206.14,1945 -100,1838.86 v1(-100,1360)
  Bottom Layer w15.75: v1(-779.37,940) -743.48,975.89 -743.48,1026.52 -410,1360 v1(-100,1360) -100,1120 T5B.1
OUTPUT6: P15.1 T6B.1 U1_LD6.7 | length 3722.1
  Top Layer w15.75: -1444.84,-1971.73 -1455.31,-1961.26 -1455.31,-1930.87 U1_LD6.7 -1475.63,-1942.05 -1445.94,-1971.73 -1406.42,-1971.73 -1230,-1795.32 v1(-1230,-1610) ; -1234.02,-1791.3 -1175.75,-1733.03 -1175.75,-1297.51 -1178.62,-1294.64 -1178.62,-1225.36 -1175.75,-1222.49 -1175.75,-1030 -1186.85,-1018.9 v1(-1186.85,-264.96) ; v1(-1170,220) -1163.45,213.45 -1163.45,193.45 P15.1 ; v1(-1080,-1610) -552.96,-1610 -492.96,-1670 T6B.1
  Bottom Layer w15.75: v1(-1230,-1610) v1(-1080,-1610) ; v1(-1186.85,-264.96) -1186.85,193.89 -1170,210.73 v1(-1170,220)
PUSH_BUTTON: P2.1 R15.2 S2.1 | length 3240
  Top Layer w15.75: R15.2 500.63,-2110.63 600,-2210 610,-2210 S2.1@620,-2210 ; P2.1 877.87,-1257.13 862.24,-1257.13 837.13,-1282.24 837.13,-1297.87 758.82,-1376.18 758.82,-1976.46 652.13,-2083.15 652.13,-2177.87 S2.1@620,-2210 ; S2.1@1110,-2210 S2.1@620,-2210
VREF1: C1.1 R1.1 R2.2 U1_LD1.2 U1_LD1.6 U1_LD2.2 U1_LD2.6 U1_LD3.2 U1_LD3.6 U1_LD4.2 U1_LD4.6 U1_LD5.2 U1_LD5.6 U1_LD6.2 U1_LD6.6 | length 10354.4
  Top Layer w15.75: U1_LD6.6 -1525.63,-1879.06 -1475.63,-1829.06 U1_LD6.2@-1475.63,-1737.32 ; U1_LD6.2 U1_LD6.2@-1475.63,-1737.32 ; v1(-1370.63,-1760) -1377.18,-1766.55 -1405.96,-1766.55 -1406.42,-1767.01 -1445.94,-1767.01 U1_LD6.2@-1475.63,-1737.32 ; v1(-820,1910) -820,1370 -703.9,1253.9 -703.9,515.04 -593.86,405 U1_LD1.6 -439.13,405 -389.13,355 U1_LD1.2 -326.14,355 -188.31,217.17 v1(-188.31,50) ; v1(-530,2030) -523.45,2023.45 -523.45,1994.59 -473.86,1945 U1_LD5.2 -410.87,1945 -360.87,1895 U1_LD5.6@-269.13,1895 ; U1_LD5.6@-206.14,1895 U1_LD5.6 U1_LD5.6@-269.13,1895 ; v1(40,1910) -92.87,2042.87 -270.16,2042.87 -298.82,2014.21 -298.82,1924.69 U1_LD5.6@-269.13,1895 ; v1(300,2040) 306.55,2033.45 306.55,1994.59 356.14,1945 U1_LD4.2 419.13,1945 469.13,1895 U1_LD4.6 U1_LD4.6@623.86,1895 ; v1(470,-1000) 470,-931.83 465,-926.83 U1_LD2.6 465,-719.76 515,-669.76 U1_LD2.2 515,-606.77 555.22,-566.55 583.45,-566.55 v1(590,-560) ; v1(907.44,-1510) 904.65,-1510 835.91,-1578.74 R1.1 830.31,-1579.06 969.69,-1579.06 R2.2 C1.1 1202.8,-1579.37 1376.1,-1752.68 1450.31,-1752.68 1480,-1722.99 U1_LD3.6 1483.94,-1687.56 1483.94,-1656.06 1504.25,-1635.75 1504.25,-1614.88 1487.13,-1597.76 1487.13,-1561.14 1526.06,-1522.2 1526.06,-1490.71 U1_LD3.2
  Bottom Layer w15.75: v1(-1370.63,-1760) 657.44,-1760 v1(907.44,-1510) 470,-1072.56 v1(470,-1000) ; v1(-820,1910) -650,1910 v1(-530,2030) ; v1(-188.31,50) -13.91,-124.4 5.03,-124.4 172.87,-292.24 172.87,-360.36 359.64,-547.13 377.76,-547.13 390.63,-560 v1(590,-560) ; v1(40,1910) 170,2040 v1(300,2040)
pads on no net: C6.0 J13.1 J13.2 J13.3 J13.4 J13.5 J13.6 J13.7 J13.8 J13.9 J13.10 J18.1 J18.2 J18.3 J18.4 J18.5 J18.6 J18.7 J18.8 J18.9 J18.10 P0.1 P0.2 P0.3 P0.4 P0.6 P0.7 P0.8 P1.3 P1.5 P1.6 P1.7 P1.8 P2.2 P2.3 P2.4 P2.5 P2.8 P3.1 P3.2 P3.4 P3.5 P3.6 P3.7 P12.1 P12.2 P12.3 P12.4 P12.5 P12.6 P12.7 P12.8 P15.2 P15.3 P15.7 P15.8

## Polygon pours and split planes (outlines as drawn)
GND on Bottom Layer "GND_L02_P000" (solid, pour order 0): -1700,2470 1700,2470 1700,-2470 -1700,-2470

## Keep-outs
Keep-Out Layer:
  the board outline again, w47.24

## Other copper
Top Layer:
  text "Group 1" at 880,2200 h90

## Silkscreen, mask and mechanical layers (free items; w line width, h text height)
Top Overlay:
  lines w10: -1330,-120 -1150,-120 -1150,-20 -1330,-20 -1330,-120 ; -1310,-840 -1145,-840 -1145,-660 -1310,-660 -1310,-840 ; -1290,1050 -1150,1050 -1150,1130 -1290,1130 -1290,1050 ; -940,-740 -790,-740 -790,-660 -940,-660 -940,-740 ; 790,500 940,500 940,700 790,700 790,500 ; 1140,500 1290,500 1290,590 1140,590 1140,500
  text "3.1" at -915,1190 h40
  text "3.0" at -1275,1180 h40
  text "3.3" at -920,1090 h40
  text "NA" at -1375,1075 h35
  text "3.2" at -1270,1070 h40
  text "3.5" at -920,990 h40
  text "3.4" at -1270,980 h40
  text "1.7" at 855,915 h40
  text "3.7" at -930,895 h40
  text "3.6" at -1280,860 h40
  text "1.6" at 1170,840 h40
  text "1.5" at 810,730 h40
  text "1.4" at 1165,730 h40
  text "Ibat" at -1290,710 h40
  text "Vbat" at -910,700 h40
  text "1.3" at 815,630 h40
  text "1.2" at 1170,625 h40
  text "D1" at -1220,605 h40
  text "IN2" at -915,600 h40
  text "NA" at 695,575 h35
  text "1.1" at 825,525 h40
  text "1.0" at 1170,525 h40
  text "IN1" at -1260,510 h40
  text "SLW" at -915,505 h40
  text "INV" at -1275,405 h40
  text "EN" at -915,400 h40
  text "ENCD" at 1170,330 h40
  text "ENCD" at 765,325 h40
  text "D2" at -1240,300 h40
  text "D2" at 1165,215 h40
  text "EN" at 835,130 h40
  text "INV" at 1165,125 h40
  text "15.1" at -920,115 h40
  text "15.0" at -1305,100 h40
  text "SLW" at 805,30 h40
  text "IN1" at 1170,25 h40
  text "15.2" at -1305,15 h40
  text "15.3" at -920,10 h40
  text "IN2" at 815,-75 h40
  text "D1" at 1170,-80 h40
  text "NA" at -1415,-85 h35
  text "15.4" at -1305,-90 h40
  text "15.5" at -920,-90 h40
  text "ENCD" at -1315,-190 h40
  text "ENCD" at -920,-195 h40
  text "12.0" at 780,-265 h40
  text "12.1" at 1160,-270 h40
  text "12.2" at 780,-360 h40
  text "12.3" at 1165,-380 h40
  text "12.4" at 785,-465 h40
  text "12.5" at 1170,-465 h40
  text "12.6" at 775,-565 h40
  text "12.7" at 1175,-565 h40
  text "0.1" at -910,-610 h40
  text "0.0" at -1275,-620 h40
  text "NA" at -1395,-665 h35
  text "NA" at -765,-715 h35
  text "0.2" at -1280,-720 h40
  text "0.3" at -915,-720 h40
  text "2.7" at 795,-720 h40
  text "2.6" at 1170,-755 h40
  text "2.5" at 805,-790 h40
  text "0.5" at -925,-795 h40
  text "0.4" at -1280,-820 h40
  text "2.4" at 1170,-860 h40
  text "0.6" at -1270,-930 h40
  text "0.7" at -925,-960 h40
  text "2.3" at 795,-970 h40
  text "2.2" at 1170,-970 h40
  text "2.1" at 815,-1060 h40
  text "2.0" at 1165,-1070 h40
  text "-" at -1195,-1230 h60 r180
  text "-" at -850,-1230 h60 r180
  text "-" at 900,-1230 h60 r180
  text "-" at 1215,-1230 h60 r180
  text "+" at -1185,-1380 h60 r90
  text "+" at 910,-1380 h60 r90
  text "+" at -850,-1390 h60 r90
  text "+" at 1225,-1390 h60 r90